# EAGLE board astable multivibrator (EAGLE 9.6.2)
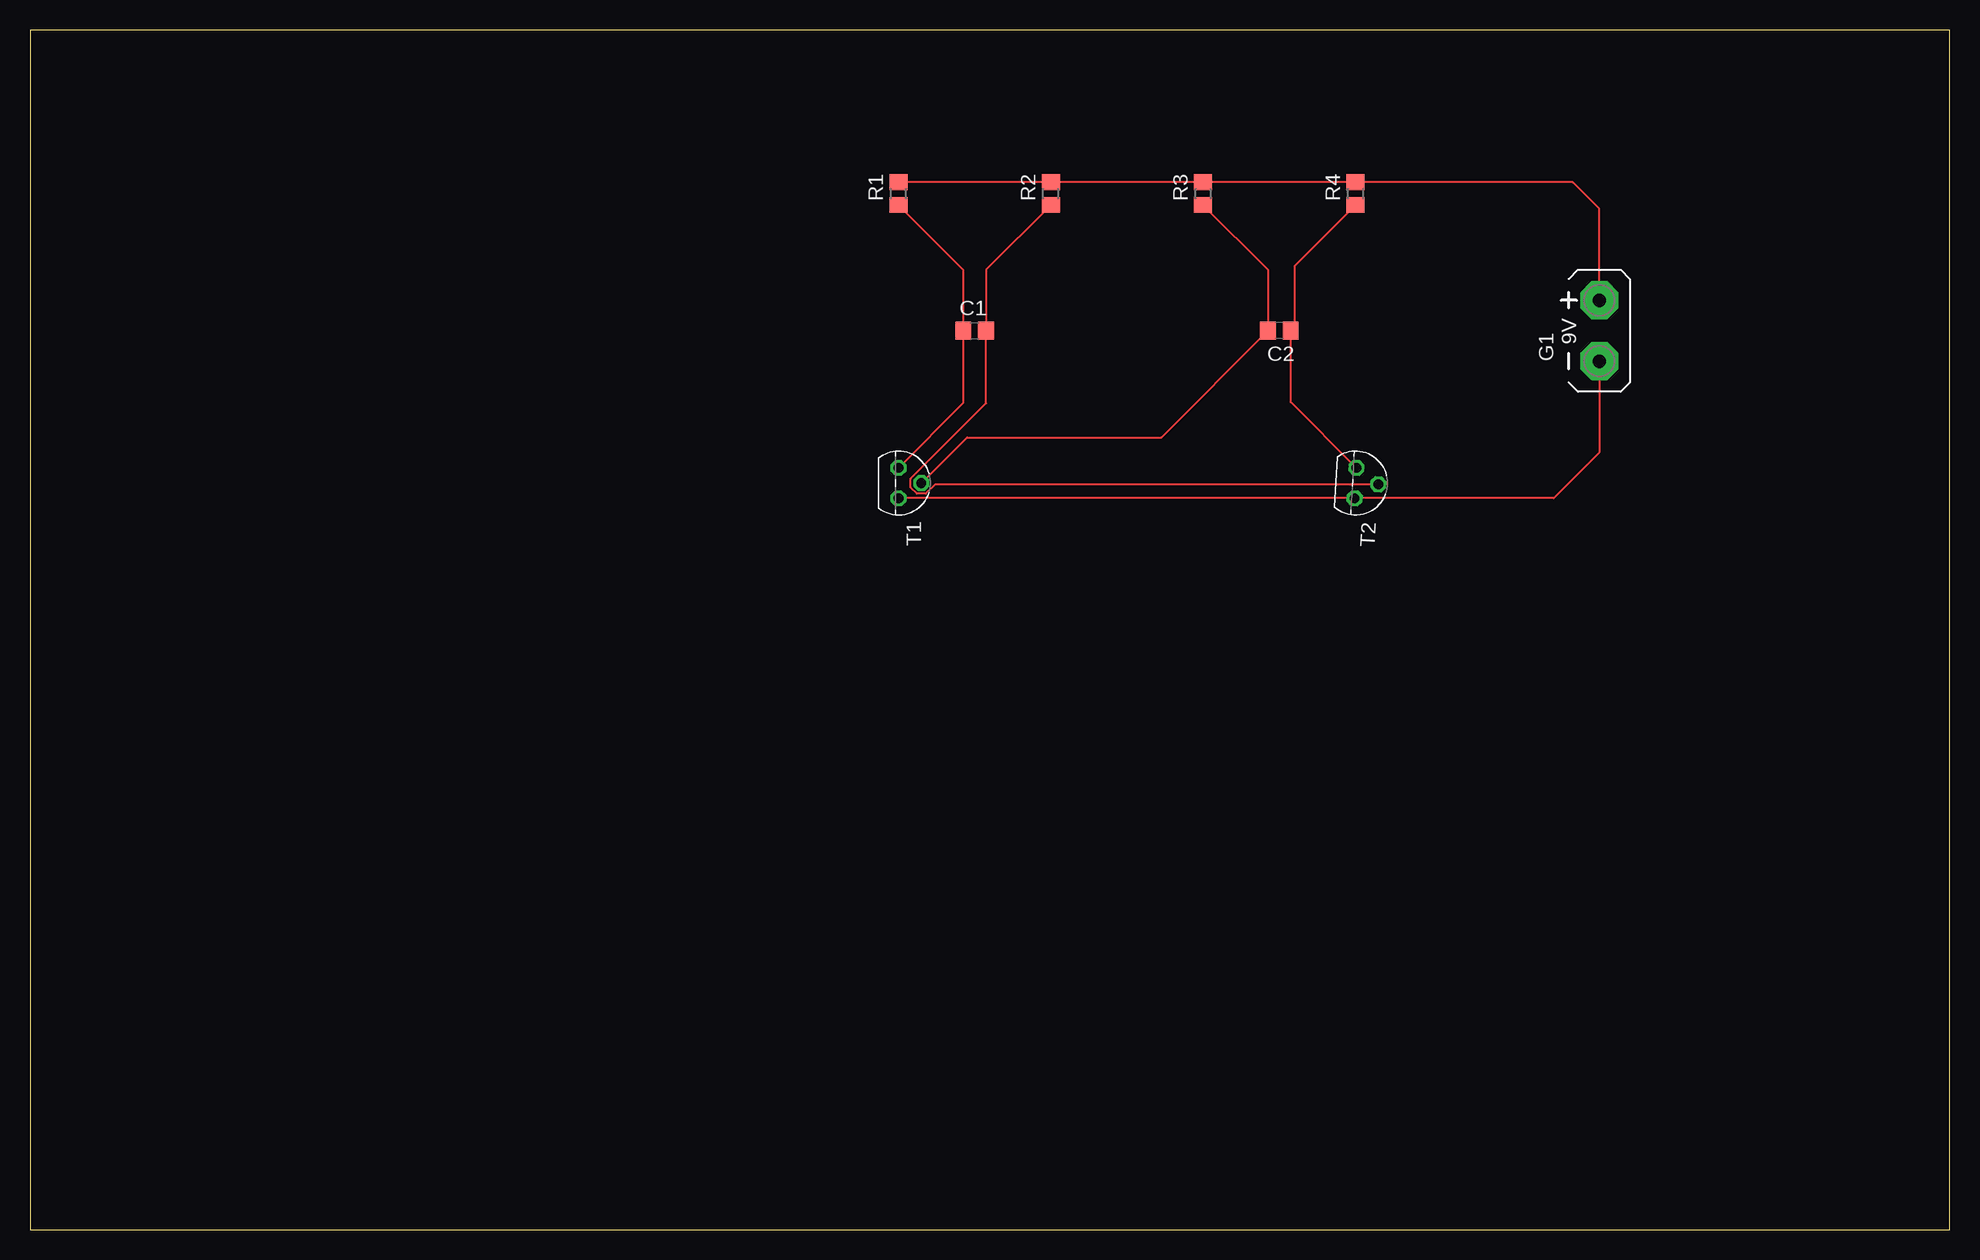
[diagram p0: board, top side]

Size 160 x 100 mm. Coordinates in mm from the lower left corner, seen from the top.
Outline: 0,0 160,0 160,100 0,100 0,0
Copper layers (1*16): Top 0.035mm / dielectric 1.5mm / Bottom 0.035mm
Design rules "default": minimum track width 6mil, minimum drill 0.35mm, track to track 6mil, track to pad 6mil, pad to pad 6mil, via to via 6mil, smd to smd 6mil, copper to edge 40mil, drill to drill 6mil, minimum pad ring 10mil, minimum via ring 8mil, stop-mask expansion 4mil, vias tented up to drill 0mil, thermal gap 10mil

## Footprints (pad centres in the part's own frame; a part is rotated, then mirrored left to right if it is on the bottom)
C0805 = smd 1.3 x 1.5: 1 -0.95,0; 2 0.95,0
AB9V = drill 1.118 pad 3.15 octagon: + 0,2.54; - 0,-2.54
R0805 = smd 1.3 x 1.5: 1 -0.95,0; 2 0.95,0
TO92 = drill 0.813 octagon: 1 1.27,0; 2 0,1.905; 3 -1.27,0

## Placement (x,y rotation side)
C1  1u  [C0805]  78.74,74.93 0 top
C2  1u  [C0805]  104.14,74.93 180 top
G1  AB9V  [AB9V]  130.81,74.93 0 top
R1  1K  [R0805]  72.39,86.36 90 top
R2  100k  [R0805]  85.09,86.36 90 top
R3  100k  [R0805]  97.79,86.36 90 top
R4  1k  [R0805]  110.49,86.36 90 top
T1  BC547  [TO92]  72.39,62.23 270 top
T2  BC547  [TO92]  110.49,62.23 266.7 top

## Library data of the parts
C1 C2 = rcl; SPICEPREFIX: C
G1 = battery
R1-R4 = rcl; SPICEPREFIX: R
T1 T2 = transistor

## Nets
GND: G1.- T1.1 T2.1
N$1: G1.+ R1.2 R2.2 R3.2 R4.2
N$2: C2.2 R3.1 T1.2
N$3: C1.2 R2.1 T2.2
N$7: C1.1 R1.1 T1.3
N$8: C2.1 R4.1 T2.3

## Tracks (layer width: path | path; a pad name or v marks a point on that pad's centre or on a via)
GND
  Top 0.152: G1.- 130.81,64.77 127,60.96 T2.1 T1.1
N$1
  Top 0.152: G1.+ 130.81,85.09 128.59,87.31 R4.2 R3.2 R2.2 R1.2
N$2
  Top 0.152: T1.2 78.11,66.04 94.3,66.04 C2.2 103.19,80.01 R3.1
N$3
  Top 0.152: R2.1 79.69,80.01 C1.2 79.69,68.88 73.41,62.6 73.41,61.86 73.93,61.34 74.66,61.34 75.44,62.12 T2.2
N$7
  Top 0.152: R1.1 77.79,80.01 C1.1 77.79,68.9 T1.3
N$8
  Top 0.152: R4.1 105.41,80.33 105.41,75.25 C2.1 105.09,68.97 T2.3